# Altium PCB 28Pins_Schematic_V1I1_PCB.PcbDoc (part 5 of 5)
Units mm, origin at the board's own origin, x right, y up, seen from the top; angles counter-clockwise.
Board outline 68.58 x 53.34 mm, 2 copper layers (L1, L2), stack 1.67 mm thick; 106 components, 72 nets, 323 pads, 86 vias.
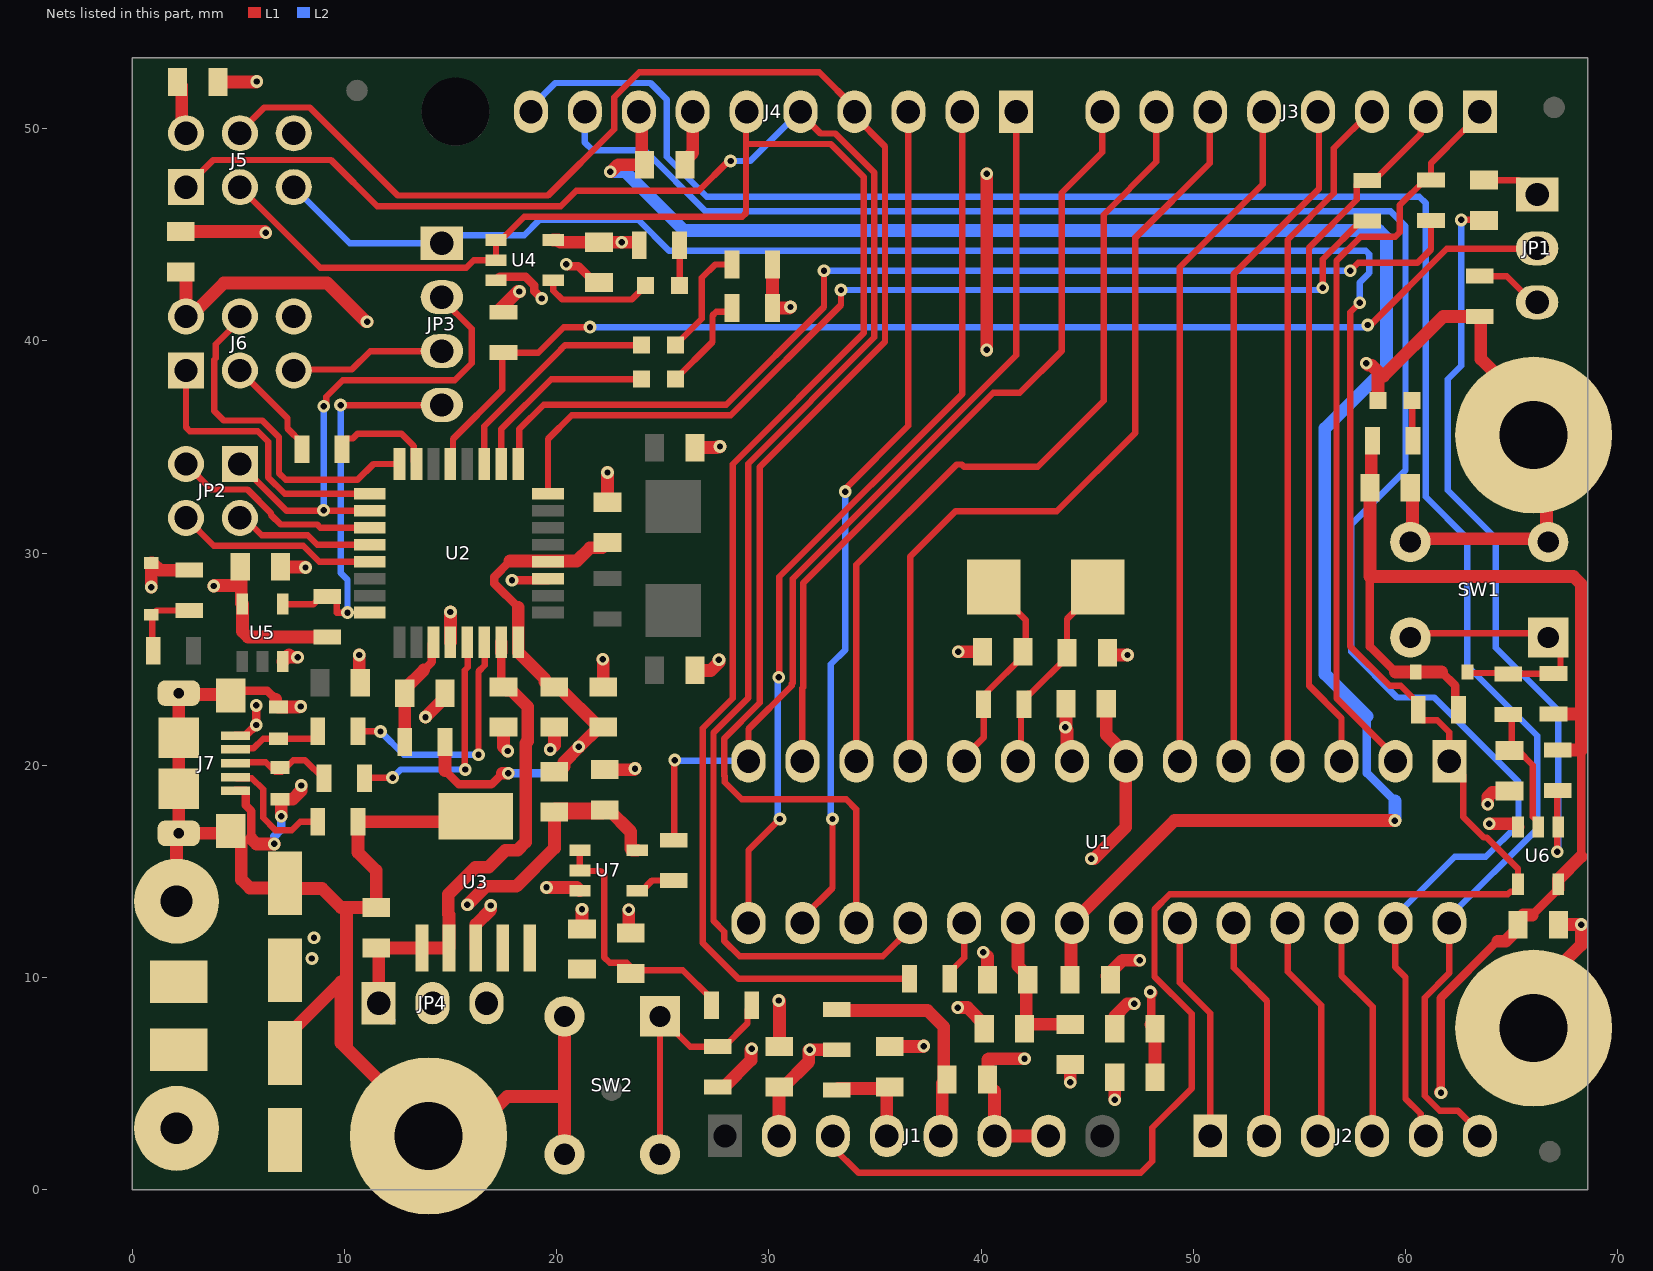
[diagram p2: the nets of this part, all layers, seen from the top]

## Via types
v1: diameter 0.6, hole 0.3, L1 to L2, 82 vias
v2: diameter 0.6/0.6 (per signal layer), hole 0.3, L1 to L2, tented both sides, 4 vias

## Nets (pads, with @x,y where several pads share a name; then routed paths per layer and width w, separated by ;. In a path a pad name is that pad's centre, name@x,y a point inside that pad or via, vN(x,y) a via of type N, cw(c..) or ccw(c..) an arc to the next point about the centre after c; other vN are vias at no path point) (continued)
16U2_HDR_RESETn: J6.5 JP3.3 | length 7.4
  L1 w0.3: J6.5@7.62,38.608 7.662,38.65 10.35,38.65 11.22,39.52 JP3.3@14.6,39.52
16U2_MISO: D3.1 U2.11 | length 10.8
  L1 w0.3: U2.11@16.6,34.2 16.6,35.975 20.225,39.6 20.225,39.624 20.401,39.8 D3.1@24,39.8
16U2_MOSI: J6.4 U2.16 | length 16.3
  L1 w0.3: J6.4@5.08,41.148 5.08,40.98 3.95,39.85 3.95,39.175 3.88,39.105 3.88,36.695 4.325,36.25 6.132,36.25 6.925,35.457 6.925,33.769 7.244,33.45 10.625,33.45 11.375,34.2 U2.16@12.6,34.2
16U2_PB4: JP2.1 JP3.2 U2.18 | length 23.6
  L1 w0.3: JP2.1@5.08,34.2 7.28,32 U2.18@11.2,32 ; v1(9.027,36.918) 9.15,37.041 9.15,37.375 9.925,38.15 15.2,38.15 16,38.95 16,40.575 14.6,41.975 JP3.2@14.6,42.06
  L2 w0.3: v1(9.025,32.025) 9.025,36.916 v1(9.027,36.918)
16U2_PB5: JP2.3 U2.19 | length 10
  L1 w0.3: JP2.3@2.54,34.2 3.74,33 5.437,33 6.55,31.887 6.55,31.8 7,31.35 8.725,31.35 8.875,31.2 U2.19@11.2,31.2
16U2_PB6: JP2.2 U2.20 | length 6.6
  L1 w0.3: JP2.2@5.08,31.66 5.298,31.66 6.108,30.85 8.276,30.85 8.726,30.4 U2.20@11.2,30.4
16U2_PB7: JP2.4 U2.21 | length 9.5
  L1 w0.3: JP2.4@2.54,31.66 3.85,30.35 8.069,30.35 8.819,29.6 U2.21@11.2,29.6
16U2_RESETn: JP3.4 R4.1 U2.24 U5.4 | length 18.5
  L1 w0.3: U5.4@7.1,27.6 8.55,27.6 8.9,27.95 R4.1@9.2,27.95 9.45,27.95 9.65,27.75 9.65,27.2 v1(10.15,27.2) ; v1(9.825,36.975) 14.595,36.975 JP3.4@14.6,36.98
  L2 w0.3: v1(9.825,36.975) 9.825,29.075 10.15,28.75 v1(10.15,27.2)
16U2_RX_LED: D4.1 U2.10 | length 9.2
  L1 w0.3: U2.10@17.4,34.2 17.4,35.85 19.75,38.2 D4.1@24,38.2
16U2_RXD: R11.1 U2.8 | length 46.6
  L1 w0.3: U2.8@19.6,32.8 19.6,35.375 20.725,36.5 28.207,36.5 33.4,41.693 v1(33.4,42.4) ; v1(56.1,42.5) 56.1,43.85 57.9,45.65 R11.1@58.2,45.65
  L2 w0.3: v1(33.4,42.4) 56,42.4 v1(56.1,42.5)
16U2_SCLK_R: J6.3 R5.2 | length 4.9
  L1 w0.3: J6.3@5.08,38.608 7.325,36.363 7.325,35.875 8,35.2 R5.2@8,34.9
16U2_TXD: R10.1 U2.9 | length 50.5
  L1 w0.3: U2.9@18.2,34.2 18.25,34.25 18.25,35.85 19.4,37 28,37 32.6,41.6 v1(32.6,43.3) ; v1(57.4,43.3) 57.775,43.675 60.568,43.675 61.2,44.307 R10.1@61.2,45.675
  L2 w0.3: v1(32.6,43.3) v1(57.4,43.3)
16U2PROG_328P_RESETn: JP1.2 R1.2 U2.13 | length 57
  L1 w0.3: U2.13@15,34.2 15.125,34.325 15.125,35.375 17.45,37.7 17.45,39.4 R1.2@17.5,39.45 19.143,39.45 20.343,40.65 v1(21.575,40.65) ; v1(58.225,40.75) 58.35,40.75 61.95,44.35 66.19,44.35 JP1.2@66.2,44.36
  L2 w0.3: v1(21.575,40.65) 58.125,40.65 v1(58.225,40.75)
"328P RESETn": J1.3 J5.5 JP3.1 R14.1 U1.1 U6.4 | length 134.4
  L1 w0.3: J1.3@33.02,2.54 33.02,2.005 34.225,0.8 47.525,0.8 48.075,1.35 48.075,2.925 49.925,4.775 49.925,8.294 48.175,10.044 48.175,13.209 48.891,13.925 64.825,13.925 64.95,14.05 65.175,14.05 65.3,14.175 65.3,15.125 63.825,16.6 63.681,16.6 62.715,17.566 62.715,19.543 U1.1@62.065,20.193 62.065,21.56 61.5,22.125 60.8,22.125 60.6,22.325 60.6,22.925 59.775,23.75 59.25,23.75 57.4,25.6 57.4,41.35 v1(57.85,41.8)
  L2 w0.3: J5.5@7.62,47.244 10.264,44.6 JP3.1@14.6,44.6 14.975,44.975 18.475,44.975 19.2,45.7 23.85,45.7 25.3,44.25 58.124,44.25 58.3,44.074 58.3,43.203 57.85,42.753 v1(57.85,41.8)
328P_16MHz_XTAL1: C27.1 R16.1 U1.9 Y1.1 | length 9.8
  L1 w0.3: U1.9@41.745,20.193 41.885,20.333 41.885,22.735 R16.1@42.025,22.875 42.025,23.175 42.225,23.375 42.325,23.375 44.05,25.1 C27.1@44.05,25.3 44.05,26.4 ; 44.049,26.401 44.049,26.899 45.5,28.35 Y1.1@45.5,28.4
328P_16MHz_XTAL2: C25.1 R16.2 U1.10 Y1.2 | length 10
  L1 w0.3: U1.10@39.205,20.193 39.205,20.393 40.125,21.313 R16.2@40.125,22.875 40.325,23.075 40.325,23.5 41.975,25.15 C25.1@41.975,25.35 42.1,25.475 42.1,26.85 40.6,28.35 Y1.2@40.6,28.4
328P_AUTO_RESETn: C11.1 R18.1 U6.1 | length 36.2
  L1 w0.3: v1(62.625,45.7) 63.675,45.7 C11.1@63.7,45.675 ; v1(67.15,15.925) 67.15,17.1 67.15,18.65 R18.1@67.3,18.8
  L2 w0.3: v1(62.625,45.7) 62.625,38.825 61.99,38.19 61.99,32.959 64.25,30.699 64.25,25.55 67.2,22.6 67.2,15.975 v1(67.15,15.925)
+3V3: C13.2 C16.2 J1.4 JP4.3 R28.2 U3.4 U3.5 | length 4.6
  L1 w0.6: R28.2@33.2,4.7 33.275,4.775 35.495,4.775 35.56,4.71 J1.4@35.56,2.54
+3V3_16U2_UCAP: C7.2 R26.2 U2.27 | length 5.2
  L1 w0.4: 13.75,24.5 14.125,24.875 U2.27@14.125,25.725
  L1 w0.6: R26.2@12.85,21.1 C7.2@12.85,23.4 12.85,23.6 13.75,24.5
+5V: C2.1 C6.2 C12.2 C14.2 J1.5 J8.1 JP4.1 L1.2 R27.1 U2.31 U3.1 U3.2 | length 35.8
  L1 w0.4: U2.31@17.4,25.8 17.4,23.8 C6.2@17.5,23.7
  L1 w0.6: JP4.1@11.62,8.8 11.62,11.28 C12.2@11.5,11.4 U3.1@13.66,11.4 U3.2@14.93,11.4 14.93,12.964 14.9,12.994 14.9,13.925 16.175,15.2 16.8,15.2 17.6,16 18.157,16 18.544,16.387 18.544,16.944 18.55,16.95 18.55,21.043 18.65,21.143 18.65,22.75 17.85,23.55 17.65,23.55 C6.2@17.5,23.7 ; U2.31@17.4,25.325 U2.31@17.4,25.8 ; R27.1@33.2,8.5 33.25,8.45 37.475,8.45 38.25,7.675 38.25,5.1 38.175,5.025 38.175,2.615 J1.5@38.1,2.54
  L2 w0.4: J8.1@2.1,2.9 J8.1@2.2,3 ; JP4.1@11.62,8.8 11.62,8.6 JP4.1@12.22,8 ; J1.5@38.1,2.34 J1.5@38.1,2.54
+5V/3V3: C8.1 C15.2 C17.1 C26.2 C28.2 C29.2 C30.2 C34.2 D5.1 D6.1 FB1.1 FB2.1 FB3.1 J1.2 J5.2 J6.2 JP4.2 R1.1 R2.1 R3.1 R4.2 R14.2 R15.1 R17.2 R18.2 R19.2 R20.2 R21.2 R27.2 R28.1 U4.5 U5.5 U6.5 U7.5 | length 115
  L1 w0.4: 58.325,28.9 58.325,25.6 59.525,24.4 ; v1@61.65,4.6 61.65,9.028 64.342,11.72 ; 61.7,24.4 62.35,23.75 R14.2@62.35,22.625 ; 65.975,12.95 U6.5@67.2,14.175 ; 68.275,15.7 68.275,20.725
  L1 w0.6: v1(0.9,28.4) D5.1@0.9,29.538 0.964,29.538 1.302,29.2 R19.2@2.7,29.2 ; C17.1@2.15,52.2 2.345,52.005 2.345,49.979 J5.2@2.54,49.784 ; C8.1@2.3,43.25 2.54,43.01 J6.2@2.54,41.148 2.748,41.148 4.325,42.725 9.2,42.725 11.025,40.9 v1(11.075,40.9) ; v1(3.85,28.45) 3.875,28.475 5.15,28.475 ; C30.2@5.1,29.35 5.15,29.3 5.15,28.475 ; R4.2@9.2,26.05 5.459,26.05 5.2,26.309 U5.5@5.2,27.6 5.15,27.65 5.15,28.475 ; v1(15.8,13.431) 16.669,14.3 18.1,14.3 19.9,16.1 FB1.1@19.9,17.8 FB1.1@19.941,17.841 ; R1.1@17.5,41.35 17.35,41.5 18.175,42.325 v1(18.25,42.325) ; U4.5@19.85,44.75 20.075,44.75 20.175,44.65 C26.2@22,44.65 v1(23.075,44.65) 23.75,44.65 R15.1@23.9,44.5 ; FB1.1@19.95,17.85 C29.2@22.142,17.85 ; C29.2@22.133,17.841 C29.2@22.142,17.85 ; C29.2@22.475,17.9 23.5,16.875 23.5,16.075 23.575,16 U7.5@23.8,16 ; R21.2@27.6,4.85 27.9,4.85 29.162,6.112 29.162,6.612 v1(29.2,6.65) ; R2.1@30.175,43.6 R3.1@30.175,41.55 30.975,41.55 v1(31.025,41.6) ; J1.2@30.48,2.54 30.48,4.83 C15.2@30.5,4.85 30.7,4.85 31.887,6.037 31.887,6.562 v1(31.925,6.6) R27.2@33.2,6.6 ; v1(44.2,5.075) FB3.1@44.2,5.9 ; v1(46.3,4.25) FB2.1@46.3,5.3 ; R17.2@58.45,35.3 58.388,35.237 58.388,33.138 C34.2@58.325,33.075 58.325,28.9 67.916,28.9 68.275,28.541 68.275,22.425 ; 59.525,24.4 D6.1@60.481,24.4 61.7,24.4 ; v1@61.65,4.6 v1(61.675,4.575) ; 64.342,11.72 64.72,11.72 65.3,12.3 C28.2@65.3,12.5 65.3,12.7 65.55,12.95 65.975,12.95 ; R20.2@66.975,22.425 68.275,22.425 ; R18.2@67.175,20.725 68.275,20.725 68.275,22.425 ; U6.5@67.2,14.175 U6.5@67.2,14.4 67.2,14.625 68.275,15.7 ; C29.2@22.142,17.85 22.192,17.9 C29.2@22.275,17.9 cw(c22.154,18.021) 22.154,17.85 C29.2@22.142,17.85
  L1 w0.8: FB1.1@19.941,17.841 C29.2@22.133,17.841
+5V/3V3_16U2: C3.2 C4.2 C5.2 FB1.2 R26.1 U2.4 U2.32 | length 27.3
  L1 w0.4: 14.75,19.76 15.403,19.107 16.932,19.107 v1@17.45,19.625 ; 17.81,29.625 17.076,28.891 17.076,28.559 18.2,27.435
  L1 w0.6: 14.75,19.76 R26.1@14.75,21.1 ; v1@17.45,19.625 v1(17.725,19.625) ; 17.81,29.625 19.6,29.625 20.95,29.625 21.575,30.25 22.15,30.25 C5.2@22.4,30.5 ; 18.2,27.435 18.2,25.325 19.45,24.075 19.45,23.95 19.7,23.7 C4.2@19.9,23.7 20.1,23.7 C3.2@22,21.8 ; FB1.2@19.9,19.7 20.1,19.7 20.35,19.95 20.35,20.15 21.063,20.863 C3.2@22,21.8 ; C3.2@22.2,21.8 C3.2@22,21.8
  L2 w0.4: v1(17.725,19.625) 19.8,19.625 v1(21.05,20.875)
+5V/3V3_328P_AVCC: C22.2 C23.2 FB3.2 U1.20 | length 7.4
  L1 w0.6: U1.20@41.745,12.573 41.745,10.555 42.2,10.1 C23.2@42.2,9.9 42.125,9.825 C22.2@42.125,7.675 ; C22.2@42.05,7.6 C22.2@42.125,7.675 ; FB3.2@44.2,7.8 42.25,7.8 C22.2@42.125,7.675
+5V/3V3_328P_VCC: C19.2 C20.2 FB2.2 U1.7 | length 12.5
  L1 w0.4: C19.2@48.013,7.787 v1@48.013,9.287
  L1 w0.6: v1(45.2,15.6) 45.325,15.6 46.825,17.1 U1.7@46.825,20.193 46.825,20.523 45.9,21.448 C20.2@45.9,22.9 ; v1(47.975,9.325) v1@48.013,9.287 ; C19.2@48.013,7.787 C19.2@48.2,7.6 FB2.2@48.2,5.3
+5V_USB: C1.1 J7.1 L1.1 | length 2.1
  L1 w0.4: J7.1@4.875,21.4 5.35,21.4 v2(5.85,21.9) v2(5.85,22.825)
  other v2: 8.475,10.9 8.575,11.875
+AREF: C21.2 C24.2 J4.8 U1.21 | length 92.2
  L1 w0.6: v1(22.525,47.975) 22.579,47.975 22.904,48.3 C21.2@24.15,48.3 24.013,48.437 24.013,50.663 J4.8@23.876,50.8 ; C24.2@44.2,9.9 44.242,9.942 44.242,12.531 49.112,17.4 v1(59.5,17.4)
  L2 w0.4: 58.185,22.315 58.185,19.636 59.5,18.321
  L2 w0.6: v1(22.525,47.975) 23.225,47.975 26,45.2 58.749,45.2 59.1,44.849 59.1,38.769 56.2,35.869 56.2,24.3 58.185,22.315 ; v1(59.5,17.4) 59.5,18.321
AD0: J2.1 U1.23 | length 10.6
  L1 w0.3: U1.23@49.365,12.573 49.365,9.76 50.8,8.325 J2.1@50.8,2.54
AD1: J2.2 U1.24 | length 10.7
  L1 w0.3: U1.24@51.905,12.573 51.905,10.47 53.475,8.9 53.475,2.675 J2.2@53.34,2.54
AD2: J2.3 U1.25 | length 10.7
  L1 w0.3: U1.25@54.445,12.573 54.445,10.28 56.025,8.7 56.025,2.685 J2.3@55.88,2.54
AD3: J2.4 U1.26 | length 10.7
  L1 w0.3: U1.26@56.985,12.573 56.985,10.09 58.45,8.625 58.45,2.57 J2.4@58.42,2.54
AD4/SDA: J2.5 J4.9 U1.27 | length 93.8
  L1 w0.3: U1.27@59.525,12.573 59.525,10.5 60,10.025 60,4.3 60.711,3.589 60.711,2.789 J2.5@60.96,2.54
  L2 w0.3: J4.9@21.336,50.8 21.336,49.35 21.711,48.975 24.15,48.975 27.025,46.1 59.3,46.1 60,45.4 60,33.9 57.45,31.35 57.45,25.35 59.6,23.2 61.353,23.2 65.325,19.228 65.325,17.225 63.788,15.687 62.312,15.687 59.525,12.9 U1.27@59.525,12.573
AD5/SCL: J2.6 J4.10 U1.28 | length 96.7
  L1 w0.3: U1.28@62.065,12.573 62.065,10.221 60.9,9.056 60.9,4.431 61.606,3.724 62.473,3.724 63.5,2.697 J2.6@63.5,2.54
  L2 w0.3: J4.10@18.796,50.8 18.796,51 19.946,52.15 24.425,52.15 25.2,51.375 25.2,48.682 27.082,46.8 60.65,46.8 60.95,46.5 60.95,32.65 62.912,30.688 62.912,24.688 66.2,21.4 66.2,17 62.065,12.865 U1.28@62.065,12.573
BUTTON_RESETn: D6.2 R20.1 R24.1 SW1.1 SW1.2 | length 12.8
  L1 w0.3: SW1.2@60.7,26.225 67.2,26.225 SW1.1@67.15,26.175 ; D6.2@62.919,24.4 62.969,24.35 64.95,24.35 64.975,24.325 67.275,24.325 67.3,24.35 SW1.1@67.3,26.2
CON_USB_N: J7.2 R6.1 Z1.2 | length 4.3
  L1 w0.3: J7.2@4.875,20.75 4.925,20.8 5.725,20.8 6.175,21.25 Z1.2@6.9,21.25 8.55,21.25 8.75,21.45 R6.1@8.75,21.6
CON_USB_P: J7.3 R7.1 Z2.2 | length 4.9
  L1 w0.3: J7.3@4.875,20.1 4.925,20.15 5.95,20.15 6.3,20.15 6.75,19.7 6.9,19.7 7.05,19.7 7.6,20.25 8.15,20.25 R7.1@9.025,19.375
GND: C1.2 C2.2 C3.1 C4.1 C5.1 C6.1 C7.1 C8.2 C9.2 C10.2 C12.1 C13.1 C14.1 C15.1 C16.1 C17.2 C19.1 C20.1 C21.1 C22.1 C23.1 C24.1 C25.2 C26.1 C27.2 C28.1 C29.1 C30.1 C31.1 C32.1 C33.1 C34.1 D1.1 J1.6 J1.7 J4.7 J5.6 J6.6 J7.5 J7.6 J7.7 J7.8 J7.9 J7.10 J7.11 J9.1 MH1.1 MH2.1 MH3.1 R8.2 R12.1 SW1.3 SW1.4 SW2.3 SW2.4 U1.8 U1.22 U2.3 U2.28 U3.3 U3.6 U4.3 U5.3 U6.3 U7.3 Z1.1 Z2.1 | length 186.3
  L1 w0.4: J7.6@4.763,23.525 6.366,23.525 6.775,23.116 ; J7.5@4.875,18.8 5.35,18.8 5.35,18.125 5.625,17.85 5.625,16.534 ; U4.3@17.15,42.85 17.325,43.025 18.54,43.025 18.95,42.615 18.95,42.35 v1(19.3,42) ; v1(17.9,28.725) U2.3@19.6,28.725 ; v1@20.544,43.525 21.025,43.525 C26.1@21.8,42.75
  L1 w0.6: J9.1@2.1,13.6 2.1,16.7 J7.9@2.2,16.8 ; C8.2@2.3,45.15 6.25,45.15 v1(6.3,45.1) ; C17.2@4.05,52.2 5.85,52.2 v1(5.875,52.225) ; J7.6@4.612,23.338 2.262,23.338 J7.8@2.2,23.4 J7.10@2.2,21.3 J7.11@2.2,18.9 J7.9@2.2,16.8 ; 5.625,16.534 5.859,16.3 v1(6.706,16.3) ; 6.775,23.116 6.775,22.85 6.875,22.75 Z1.1@6.9,22.75 7.85,22.75 7.875,22.775 v1(7.95,22.775) ; C30.1@7,29.35 8.15,29.35 v1(8.175,29.325) ; v1(7.025,17.6) 7.025,18.35 7.075,18.4 7.559,18.4 7.975,18.816 v1(7.975,19.05) ; U5.3@7.1,24.9 7.4,25.2 7.5,25.1 v1(7.8,25.1) ; C2.2@7.2,6.45 7.2,7.15 9.85,9.8 9.85,6.925 10.1,6.675 ; v1(10.7,25.2) 10.7,23.95 C31.1@10.75,23.9 ; v1(13.825,22.275) 14.75,23.2 C7.1@14.75,23.4 ; U2.28@15,25.8 v1(15,27.225) ; U3.3@16.2,11.4 16.2,12.5 16.9,13.2 v1(16.9,13.4) ; U3.6@16.2,17.6 15.95,17.35 R8.2@10.65,17.35 10.65,15.9 11.5,15.05 C12.1@11.5,13.3 10.1,13.3 ; C6.1@17.5,21.8 17.5,20.875 v1(17.7,20.675) ; v1(19.525,14.25) 20.95,14.25 U7.3@21.1,14.1 ; v1(19.7,20.75) 19.9,20.95 C4.1@19.9,21.8 ; SW2.4@20.375,1.675 20.375,4.4 ; SW2.3@20.375,8.175 20.375,4.4 ; C13.1@21.2,12.3 v1(21.2,13.225) ; C26.1@21.8,42.75 C26.1@22,42.75 ; v1(22.175,25) 22.175,24.975 22.2,24.95 C3.1@22.2,23.7 ; C29.1@22.275,19.8 23.65,19.8 v1(23.7,19.85) ; C5.1@22.4,32.4 v1(22.4,33.8) ; v1(23.4,13.2) 23.4,12.3 23.5,12.2 C33.1@23.5,12.1 ; C21.1@26.05,48.3 26.05,48.5 26.416,48.866 J4.7@26.416,50.8 ; C10.2@26.525,24.475 27.266,24.475 27.65,24.859 v1(27.65,24.975) ; C9.2@26.525,34.975 27.55,34.975 27.575,35 27.675,35 v1(27.7,35.025) ; v1(30.475,8.925) 30.5,8.9 C15.1@30.5,6.75 ; C16.1@35.7,6.75 37.275,6.75 v1(37.3,6.775) ; v1(38.9,8.588) 39.362,8.588 40.15,7.8 C22.1@40.15,7.6 ; v1(38.925,25.35) C25.2@40.075,25.35 ; v1(40.1,11.2) 40.3,11 C23.1@40.3,9.9 ; v1(40.275,39.575) v1(40.275,47.875) ; v1(42.05,6.175) 40.359,6.175 40.325,6.141 40.325,5.225 C14.1@40.3,5.2 40.3,5 40.64,4.66 J1.6@40.64,2.54 J1.7@43.18,2.54 ; C20.1@44,22.9 44,21.825 v1(43.975,21.8) 43.975,21.746 44.055,21.665 44.055,20.423 U1.8@44.285,20.193 ; C27.2@45.95,25.3 46.05,25.2 v1(46.9,25.2) ; C24.1@46.1,9.9 45.925,10.075 46.675,10.825 v1(47.475,10.825) ; C19.1@46.3,7.6 46.3,8.175 46.9,8.775 v1(47.225,8.775) ; v1(58.15,38.95) 58.25,38.85 58.4,38.85 58.7,38.55 ; D1.1@58.7,37.2 58.7,38.55 ; C34.1@60.225,33.075 60.325,32.975 SW1.4@60.325,30.8 ; SW1.4@60.275,30.675 SW1.3@66.775,30.675 ; v1(63.875,18.175) 63.875,18.516 64.084,18.725 64.825,18.725 C32.1@64.9,18.8 ; v1(63.95,17.25) 65.15,17.25 U6.3@65.3,17.1 ; MH2.1@66.04,7.62 66.04,9.308 68.275,11.543 v1(68.275,12.5) C28.1@67.2,12.5 ; SW1.3@66.925,30.7 66.638,30.987 66.638,34.962 MH3.1@66.04,35.56 66.04,36.661 63.55,39.151 63.55,41.1 R12.1@63.5,41.15 61.775,41.15 58.966,38.341 58.909,38.341 58.7,38.55 ; J7.9@2.2,16.8 4.55,16.8 J7.7@4.65,16.9 5.15,16.4 5.15,14.625 5.55,14.225 6.975,14.225 C1.2@7.2,14.45 7.45,14.2 8.95,14.2 9.85,13.3 10.1,13.3 ; 10.1,6.675 13.97,2.805 MH1.1@13.97,2.54 15.815,2.54 17.675,4.4 20.375,4.4 ; 10.1,6.675 10.1,13.3
  L2 w0.4: v1@6.65,16.25 6.7,16.3 v1(6.706,16.3) 6.706,16.656 7.025,16.975 v1(7.025,17.6)
  other v1: 20.455,43.614
IO0: J3.1 R10.2 U1.2 | length 35.7
  L1 w0.3: U1.2@59.525,20.193 59.525,20.393 56.75,23.168 56.75,43.769 57.893,44.913 59.513,44.913 59.725,45.125 59.725,46.4 60.9,47.575 R10.2@61.2,47.575 61.2,48.375 62.775,49.95 62.85,49.95 63.5,50.6 J3.1@63.5,50.8
IO1: J3.2 R11.2 U1.3 | length 33.9
  L1 w0.3: U1.3@56.985,20.193 56.985,22.226 55.45,23.761 55.45,44.395 57.7,46.645 57.7,47.35 57.9,47.55 R11.2@58.2,47.55 58.5,47.55 60.711,49.761 60.711,50.551 J3.2@60.96,50.8
IO2: J3.3 U1.4 | length 32.3
  L1 w0.3: U1.4@54.445,20.193 54.445,44.77 56.625,46.95 56.625,49.075 58.35,50.8 J3.3@58.42,50.8
IO3: J3.4 U1.5 | length 32.3
  L1 w0.3: U1.5@51.905,20.193 51.905,43.155 55.925,47.175 55.925,50.755 J3.4@55.88,50.8
IO4: J3.5 U1.6 | length 32.3
  L1 w0.3: U1.6@49.365,20.193 49.365,43.465 53.275,47.375 53.275,50.735 J3.5@53.34,50.8
IO5: J3.6 U1.11 | length 39.3
  L1 w0.3: U1.11@36.665,20.193 36.665,29.84 38.8,31.975 43.575,31.975 47.275,35.675 47.275,44.875 50.775,48.375 50.775,50.775 J3.6@50.8,50.8
IO6: J3.7 U1.12 | length 38.8
  L1 w0.3: U1.12@34.125,20.193 34.125,29.45 38.851,34.176 39.099,34.176 39.2,34.075 42.675,34.075 45.775,37.175 45.775,45.95 48.26,48.435 J3.7@48.26,50.8
IO7: J3.8 U1.13 | length 37.2
  L1 w0.3: U1.13@31.585,20.193 31.585,23.634 31.625,23.674 31.625,28.592 40.583,37.55 41.825,37.55 43.8,39.525 43.8,46.975 45.72,48.895 J3.8@45.72,50.8
IO8: J4.1 R22.2 U1.14 | length 43.4
  L1 w0.3: v1(25.575,20.25) 25.55,20.225 25.55,16.475 R22.2@25.75,16.675 ; U1.14@29.045,20.193 29.045,21.713 31.085,23.753 31.085,23.841 31.125,23.881 31.125,28.799 41.656,39.33 J4.1@41.656,50.8
  L2 w0.3: v1@25.551,20.274 v1(25.575,20.25) 25.603,20.222 29.016,20.222 U1.14@29.045,20.193
IO9: J4.2 U1.15 | length 42.5
  L1 w0.3: U1.15@29.045,12.573 29.045,15.995 v1(30.525,17.475) ; v1(30.475,24.15) 30.475,24.175 30.5,24.2 30.5,28.881 39.116,37.497 J4.2@39.116,50.8
  L2 w0.3: v1(30.475,24.15) 30.425,24.1 30.425,17.656 30.525,17.556 v1(30.525,17.475)
MISO: J4.5 J5.1 U1.18 | length 86.6
  L1 w0.3: J5.1@2.54,47.244 3.821,48.525 9.375,48.525 11.55,46.35 20.2,46.35 20.925,47.075 26.7,47.075 28.1,48.475 v1(28.2,48.475) ; J4.5@31.496,51 J4.5@31.496,50.8 31.496,50.718 32.439,49.775 33.132,49.775 34.975,47.932 34.975,40.164 29.025,34.214 29.025,23.175 27.395,21.545 27.395,12.675 27.9,12.17 27.9,11.725 28.625,11 35.375,11 36.665,12.29 U1.18@36.665,12.573
  L2 w0.3: v1(28.2,48.475) 29.125,48.475 31.45,50.8 J4.5@31.496,50.8
MOSI: J4.4 J5.4 U1.17 | length 82.8
  L1 w0.3: J5.4@5.08,49.784 5.08,49.855 6.225,51 8.375,51 12.525,46.85 19.6,46.85 22.726,49.976 22.726,51.476 23.9,52.65 32.386,52.65 34.036,51 34.036,50.6 35.475,49.161 35.475,39.957 29.575,34.057 29.575,22.95 27.895,21.27 27.895,19.517 27.925,19.487 27.925,19.2 28.725,18.4 33.65,18.4 34.125,17.925 U1.17@34.125,12.573
NetC8_2: 
NetC11_2: C11.2 JP1.1 | length 2.8
  L1 w0.3: C11.2@63.7,47.575 65.325,47.575 66,46.9 JP1.1@66.2,46.9
NetC32_2: C32.2 R24.2 U6.2 | length 5.9
  L1 w0.3: R24.2@65,22.4 65,20.8 65.1,20.7 65.3,20.7 66,20 66,17.575 66.25,17.325 U6.2@66.25,17.1
NetD1_2: D1.2 R17.1 | length 1.9
  L1 w0.3: D1.2@60.3,37.2 60.325,37.175 60.325,35.325 R17.1@60.35,35.3
NetD2_1: D2.1 U4.4 | length 5.3
  L1 w0.3: U4.4@19.85,42.85 19.85,42.369 20.269,41.95 23.55,41.95 D2.1@24.2,42.6
NetD2_2: D2.2 R15.2 | length 1.9
  L1 w0.3: D2.2@25.8,42.6 R15.2@25.8,44.5
NetD3_2: D3.2 R2.2 | length 5.4
  L1 w0.3: D3.2@25.6,39.8 26.85,41.05 26.85,42.975 27.475,43.6 R2.2@28.275,43.6
NetD4_2: D4.2 R3.2 | length 4.8
  L1 w0.3: D4.2@25.6,38.2 27.35,39.95 27.35,41.199 27.526,41.375 28.1,41.375 R3.2@28.275,41.55
NetD5_2: D5.2 R19.1 R23.1 | length 3.6
  L1 w0.3: R23.1@1,25.4 0.95,25.45 0.95,27.05 D5.2@0.9,27.1 0.964,27.1 1.164,27.3 R19.1@2.7,27.3
NetJ6_1: J6.1 U2.17 | length 13.6
  L1 w0.3: J6.1@2.54,38.608 2.54,35.926 2.716,35.75 5.925,35.75 6.425,35.25 6.425,33.562 7.187,32.8 U2.17@11.2,32.8
NetJ7_4: J7.4 R8.1 | length 5.9
  L1 w0.3: J7.4@4.875,19.45 4.925,19.4 5.644,19.4 6.175,18.869 6.175,17.531 6.756,16.95 7.524,16.95 7.924,17.35 R8.1@8.75,17.35
NetJP1_3: JP1.3 R12.2 | length 3.2
  L1 w0.3: R12.2@63.5,43.05 64.77,43.05 66,41.82 JP1.3@66.2,41.82
NetR5_1: R5.1 U2.15 | length 5
  L1 w0.3: R5.1@9.9,34.9 9.9,35.2 10.1,35.4 10.4,35.4 10.625,35.625 12.695,35.625 13.275,35.045 13.275,34.325 U2.15@13.4,34.2
NetR6_2: R6.2 U2.30 | length 11.6
  L1 w0.3: R6.2@10.65,21.6 11.7,21.6 v1(11.706,21.594) ; v1(16.325,20.5) 16.325,24.425 16.625,24.725 16.625,25.775 U2.30@16.6,25.8
  L2 w0.3: v1(11.706,21.594) 12.8,20.5 v1(16.325,20.5)
NetR22_1: R22.1 U7.4 | length 2
  L1 w0.3: U7.4@23.825,14.125 U7.4@23.8,14.1 24.025,14.1 24.5,14.575 R22.1@25.525,14.575
SCK: J4.6 J5.3 R13.2 U4.1 U4.2 | length 87.7
  L1 w0.3: J5.3@5.08,47.244 8.874,43.45 15.745,43.45 16.095,43.8 U4.2@17.15,43.8 U4.1@17.15,44.75 17.375,44.75 18.475,45.85 28.749,45.85 28.925,46.026 28.925,49.275 ; J4.6@28.956,50.8 28.875,50.719 28.925,50.669 28.925,49.275 ; R13.2@36.625,9.95 28.575,9.95 26.895,11.63 26.895,21.752 28.3,23.157 28.3,34.196 34.475,40.371 34.475,47.725 32.925,49.275 28.925,49.275
"SCK R": R13.1 U1.19 | length 2.9
  L1 w0.3: R13.1@38.525,9.95 38.525,10.25 39.205,10.93 U1.19@39.205,12.573
SS: J4.3 U1.16 | length 40.4
  L1 w0.3: U1.16@31.585,12.573 31.585,12.81 33,14.225 v1(33,17.475) ; v1(33.6,32.9) 33.6,33.025 36.576,36.001 J4.3@36.576,50.8
  L2 w0.3: v1(33,17.475) 32.925,17.55 32.925,24.759 33.6,25.434 v1(33.6,32.9)
USB_P: R7.2 U2.29 | length 11
  L1 w0.3: R7.2@10.95,19.425 v1(12.275,19.425) ; v1(15.693,19.807) 15.675,19.825 15.675,24.482 15.813,24.62 15.813,25.787 U2.29@15.8,25.8
  L2 w0.3: v1(12.275,19.425) 12.657,19.807 v1(15.693,19.807)
USER_BUTTON: R21.1 R25.1 SW2.1 SW2.2 | length 12.6
  L1 w0.3: SW2.2@24.875,1.675 SW2.1@24.875,8.175 26.3,6.75 R21.1@27.6,6.75 27.9,6.75 29,7.85 29,8.5 R25.1@29.2,8.7
USER_BUTTON_BUF: C33.2 R25.2 U7.1 U7.2 | length 12.2
  L1 w0.3: U7.1@21.1,16 U7.2@21.1,15.05 21.125,15.025 22.074,15.025 22.25,14.849 22.25,10.95 22.5,10.7 23.3,10.7 23.6,10.4 23.65,10.35 25.95,10.35 27.3,9 R25.2@27.3,8.7
pads on no net: FID1.1 FID2.1 FID3.1 FID4.1 J1.1 J1.8 MH4.1 U2.5 U2.6 U2.7 U2.12 U2.14 U2.22 U2.23 U2.25 U2.26

## Polygon pours and split planes (outlines as drawn)
GND on L2 "L2-No Net" (solid, remove dead copper, pour order 27): 5.7,53.1 5.7,23.4 7.2,23.4 7.2,22.8 7.6,22.4 7.6,18.7 9.1,18.7 9.2,18.6 9.2,13.2 9.3,13.3 9.3,13.9 16.2,13.9 16.4,13.7 16.235,13.535 16.235,12.916 26.184,12.916 30.6,8.5 35.1,8.5 37.6,6 62.4,6 62.4,0.2 68.5,0.2 68.5,13.1 68.3,13.3 63.3,13.3 63.3,11.2 58.3,11.2 58.3,15.6 58.9,16.2 63.7,16.2 64.7,17.2 64.7,18.7 62.4,18.7 62.4,16.7 57.9,16.7 57.1,17.5 55.8,17.5 55.8,36.3 58.6,39.1 58.6,39.6 57.5,39.6 57.2,39.9 21.3,39.9 20.9,40.3 21,40.4 21,43.8 19,43.8 19,40.4 16.7,38.1 10.3,38.1 10.3,51.4 10.179,51.279
GND on L2 "L2-No Net" (solid, remove dead copper, pour order 26): 68.4,47.5 67.8,47.5 67.4,47.5 26.8,47.5 25.49,48.81 25.49,52.568 68.368,52.568 68.4,52.6
+5V/3V3 on L2 "L2-No Net" (solid, remove dead copper, pour order 23): 16.3,44.4 16.3,43.2 10.5,43.2 10.6,43.1 10.6,40.1 13.2,40.1 13.8,40.7 18.3,40.7 18.7,41.1 18.7,44 21.4,44 21.4,41.3 31.6,41.3 31.6,43.6 24.9,43.6 24.8,43.5 23.1,45.2 19.6,45.2 18.8,44.4
+5V/3V3 on L2 "L2-No Net" (solid, remove dead copper, pour order 22): 0.3,6.5 7.1,6.5 10.5,9.9 10.5,10.1 12.7,10.1 12.7,7.8 15.3,7.8 15.3,9.9 16.1,10.7 22.8,10.7 23.9,9.6 26.1,9.6 26.1,7.3 27.4,7.3 28.4,6.3 28.5,6.4 33.4,6.4 35.7,4.1 39.8,4.1 39.8,0.6 62.1,0.6 62.1,6 47.2,6 46.9,5.7 37.2,5.7 34.7,8.2 30.4,8.2 25.8,12.8 25.6,12.6 16.4,12.6 16.4,13.7 9.4,13.7 9.4,10.3 7.7,10.3 7.7,15.5 7.4,15.8 6.1,15.8 6.1,18.3 6,18.4 5.3,18.4 5.3,51 0.3,51
+3V3 on L2 "L2-No Net" (solid, remove dead copper, pour order 18): 15.9,7.8 19.5,7.8 22.3,5 26.1,5 27.1,4 33.7,4 34.7,3 34.7,1.5 36.4,1.5 36.4,3.9 35.5,3.9 33.3,6.1 28.1,6.1 27.2,7 23.5,7 23.5,9.5 21.8,11.2 15.8,11.2 15.8,7.9
+5V on L2 "L2-No Net" (solid, remove dead copper, pour order 17): 0.3,0.3 0.3,6.2 7.4,6.2 10.8,9.6 10.8,9.8 12.4,9.8 12.4,7.5 19,7.5 21.8,4.7 25.9,4.7 26.8,3.8 26.8,1.3 37.2,1.3 37.2,3.6 39,3.6 39,0.3
+5V/3V3_328P_VCC on L2 "L2-No Net" (solid, remove dead copper, pour order 0): 45,15.3 46.9,15.3 47.8,14.4 47.7,14.3 47.7,9.1 50.8,9.1 50.7,9.2 50.7,16 45.1,16 44.8,15.7 45,15.5
GND on L2 "L2-No Net" (solid, remove dead copper, pour order 28): 11.4,52.2
GND on L2 "L2-No Net" (solid, remove dead copper, pour order 25): 68.4,52.8
GND on L2 "L2-No Net" (solid, remove dead copper, pour order 24): 68,52.5
+5V_USB on L2 "L2-No Net" (solid, remove dead copper, pour order 21): 5.6,23.2 5.6,18.6 7,18.6 8.1,17.5 8.1,10.5 8.9,10.5 8.9,17 7.3,18.6 7.3,23.2
+5V_USB on L2 "L2-No Net" (solid, remove dead copper, pour order 20): 5.5,23.2
+5V_USB on L2 "L2-No Net" (solid, remove dead copper, pour order 19): 5.5,23.2
+5V on L2 "L2-No Net" (solid, remove dead copper, pour order 16): 0.3,0.3
+5V on L2 "L2-No Net" (solid, remove dead copper, pour order 15): 0.3,0.3
+5V on L2 "L2-No Net" (solid, remove dead copper, pour order 14): 0.3,0.3
+5V on L2 "L2-No Net" (solid, remove dead copper, pour order 13): 0,0
no net on L2 "NONET_L02_P001" (solid, pour order 1): -4.6,18.9
+3V3 on L1 "L2-No Net" (solid, remove dead copper, pour order 40): 15.9,7.8 18.8,7.8 18.8,9.7 22,9.7 21.8,11 21.9,11 20.1,11 20.1,12.6 17.3,12.6 17.1,12.4 17.1,10 15.9,10
+5V_USB on L1 "L2-No Net" (solid, remove dead copper, pour order 39): 0.3,8.8 8.1,8.8 8.1,10.1 8.4,10.1 9,10.7 9,12.4 6.2,12.4 4.9,11.1 0.3,11.1
+5V on L1 "L2-No Net" (solid, remove dead copper, pour order 38): 4.2,1
+5V on L1 "L2-No Net" (solid, remove dead copper, pour order 37): 4,0.8
+5V on L1 "L2-No Net" (solid, remove dead copper, pour order 36): -2.1,5.3
+5V on L1 "L2-No Net" (solid, remove dead copper, pour order 35): 0.3,7.4 4,7.4 4,3.8 8.1,3.8 8.1,0.3 0.3,0.3

## Text inside footprints (layer, text, board x,y; h text height)
J1: Top Overlay "1" at 28.44,0.34 h1 r90
J2: Top Overlay "1" at 51.3,0.34 h1 r90
J3: Top Overlay "1" at 63,53 h1 r270
J4: Top Overlay "1" at 41.156,53 h1 r270
J5: Top Overlay "1" at 0.45,46.7 h1
J6: Top Overlay "1" at 3.14,36.408 h1 r90
JP1: Top Overlay "1" at 67.95,47.075 h1
JP2: Top Overlay "1" at 4.48,36.4 h1 r270
JP3: Top Overlay "1" at 12.4,44.1 h1
JP4: Top Overlay "1" at 12.12,6.6 h1 r90